# Altium PCB PD.PcbDoc
Units mil, origin at the board's own origin, x right, y up, seen from the top; angles counter-clockwise.
Board outline 1400 x 1470 mil, 2 copper layers (Top Layer, Bottom Layer); 38 components, 14 nets, 97 pads, 72 vias.
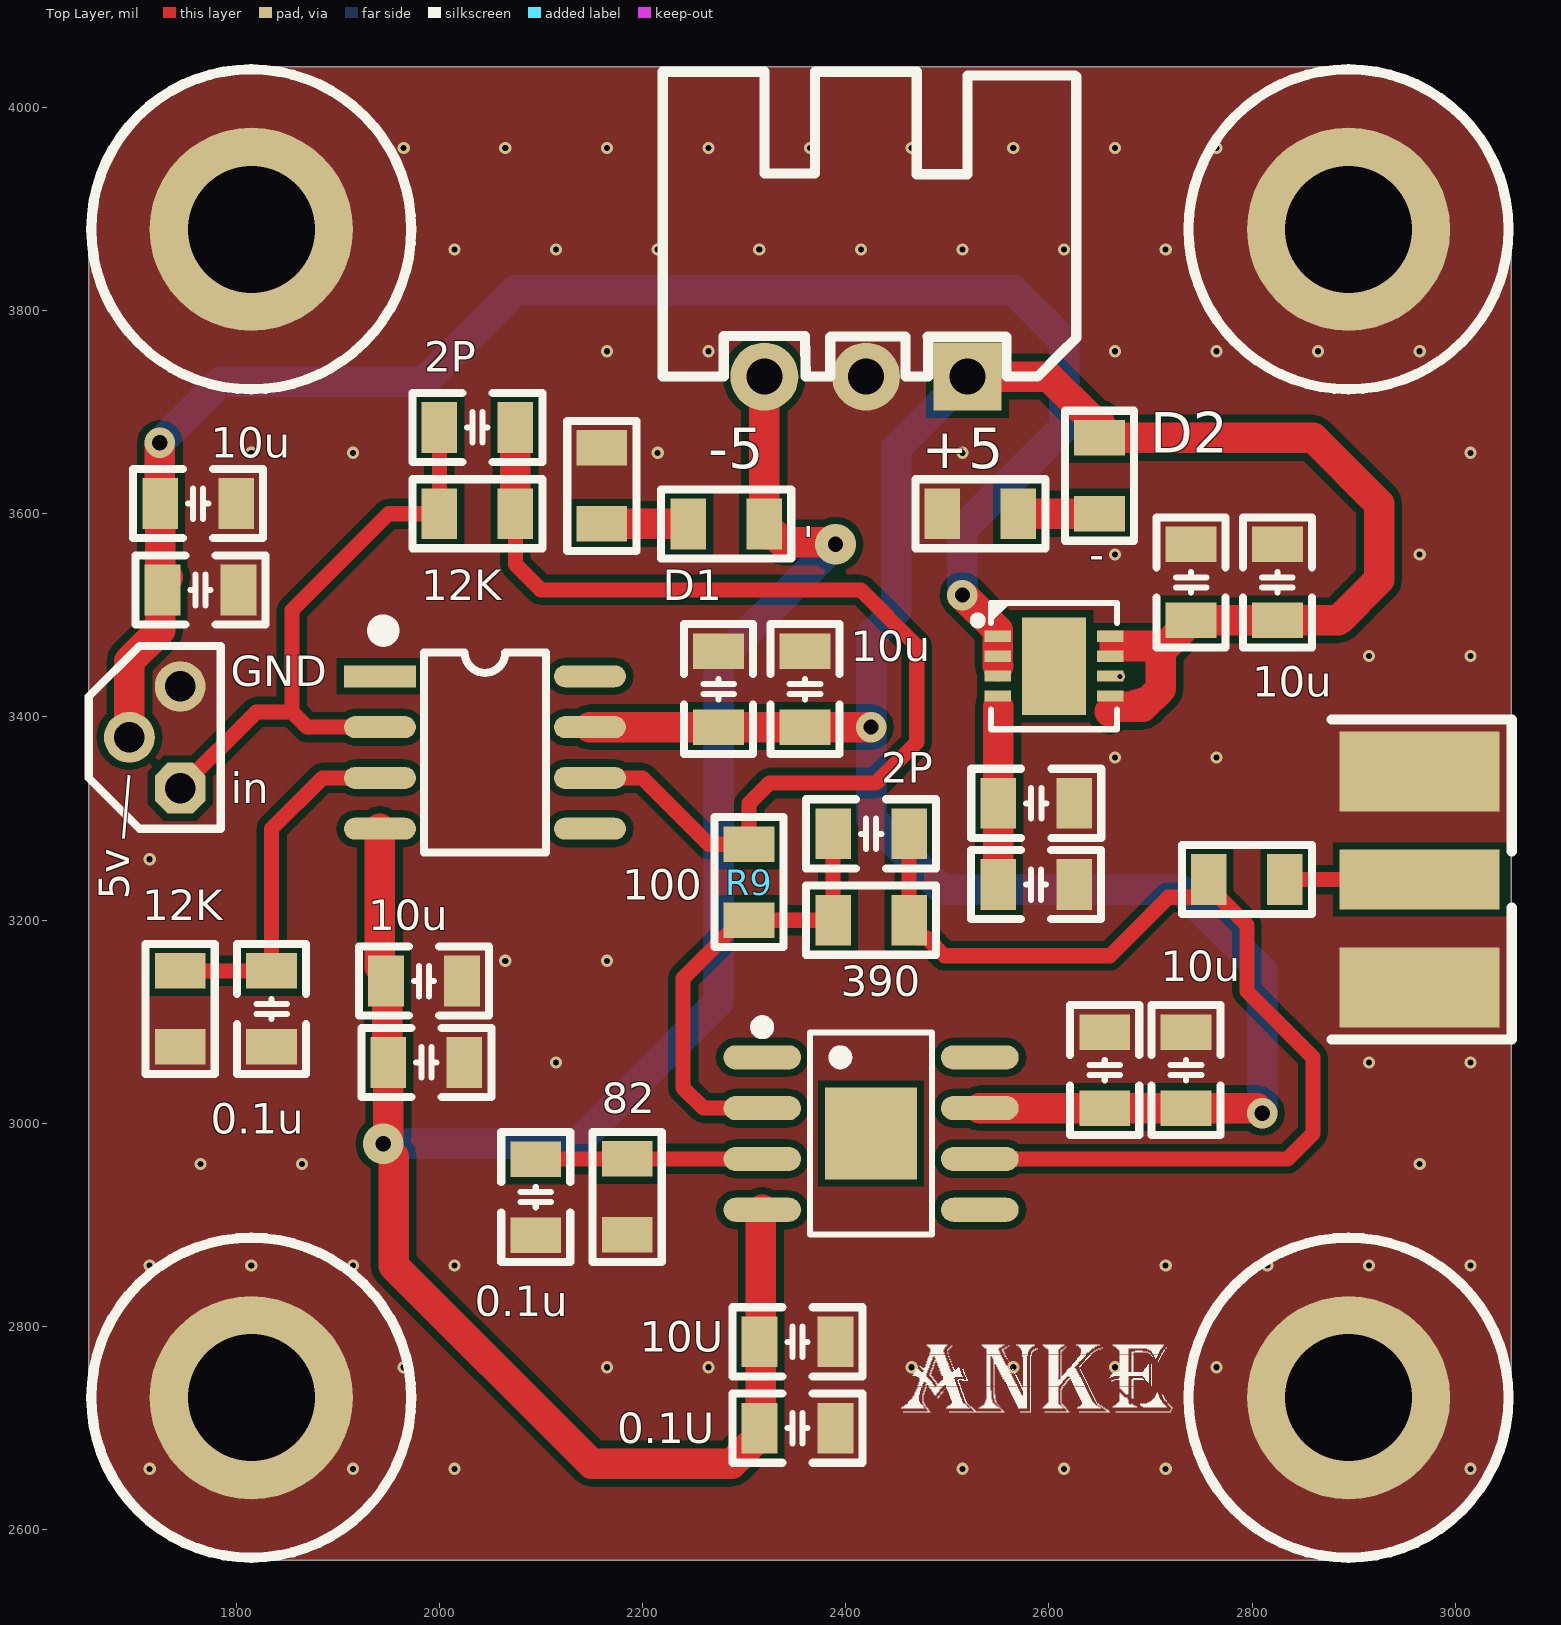
[diagram p0: Top Layer view]
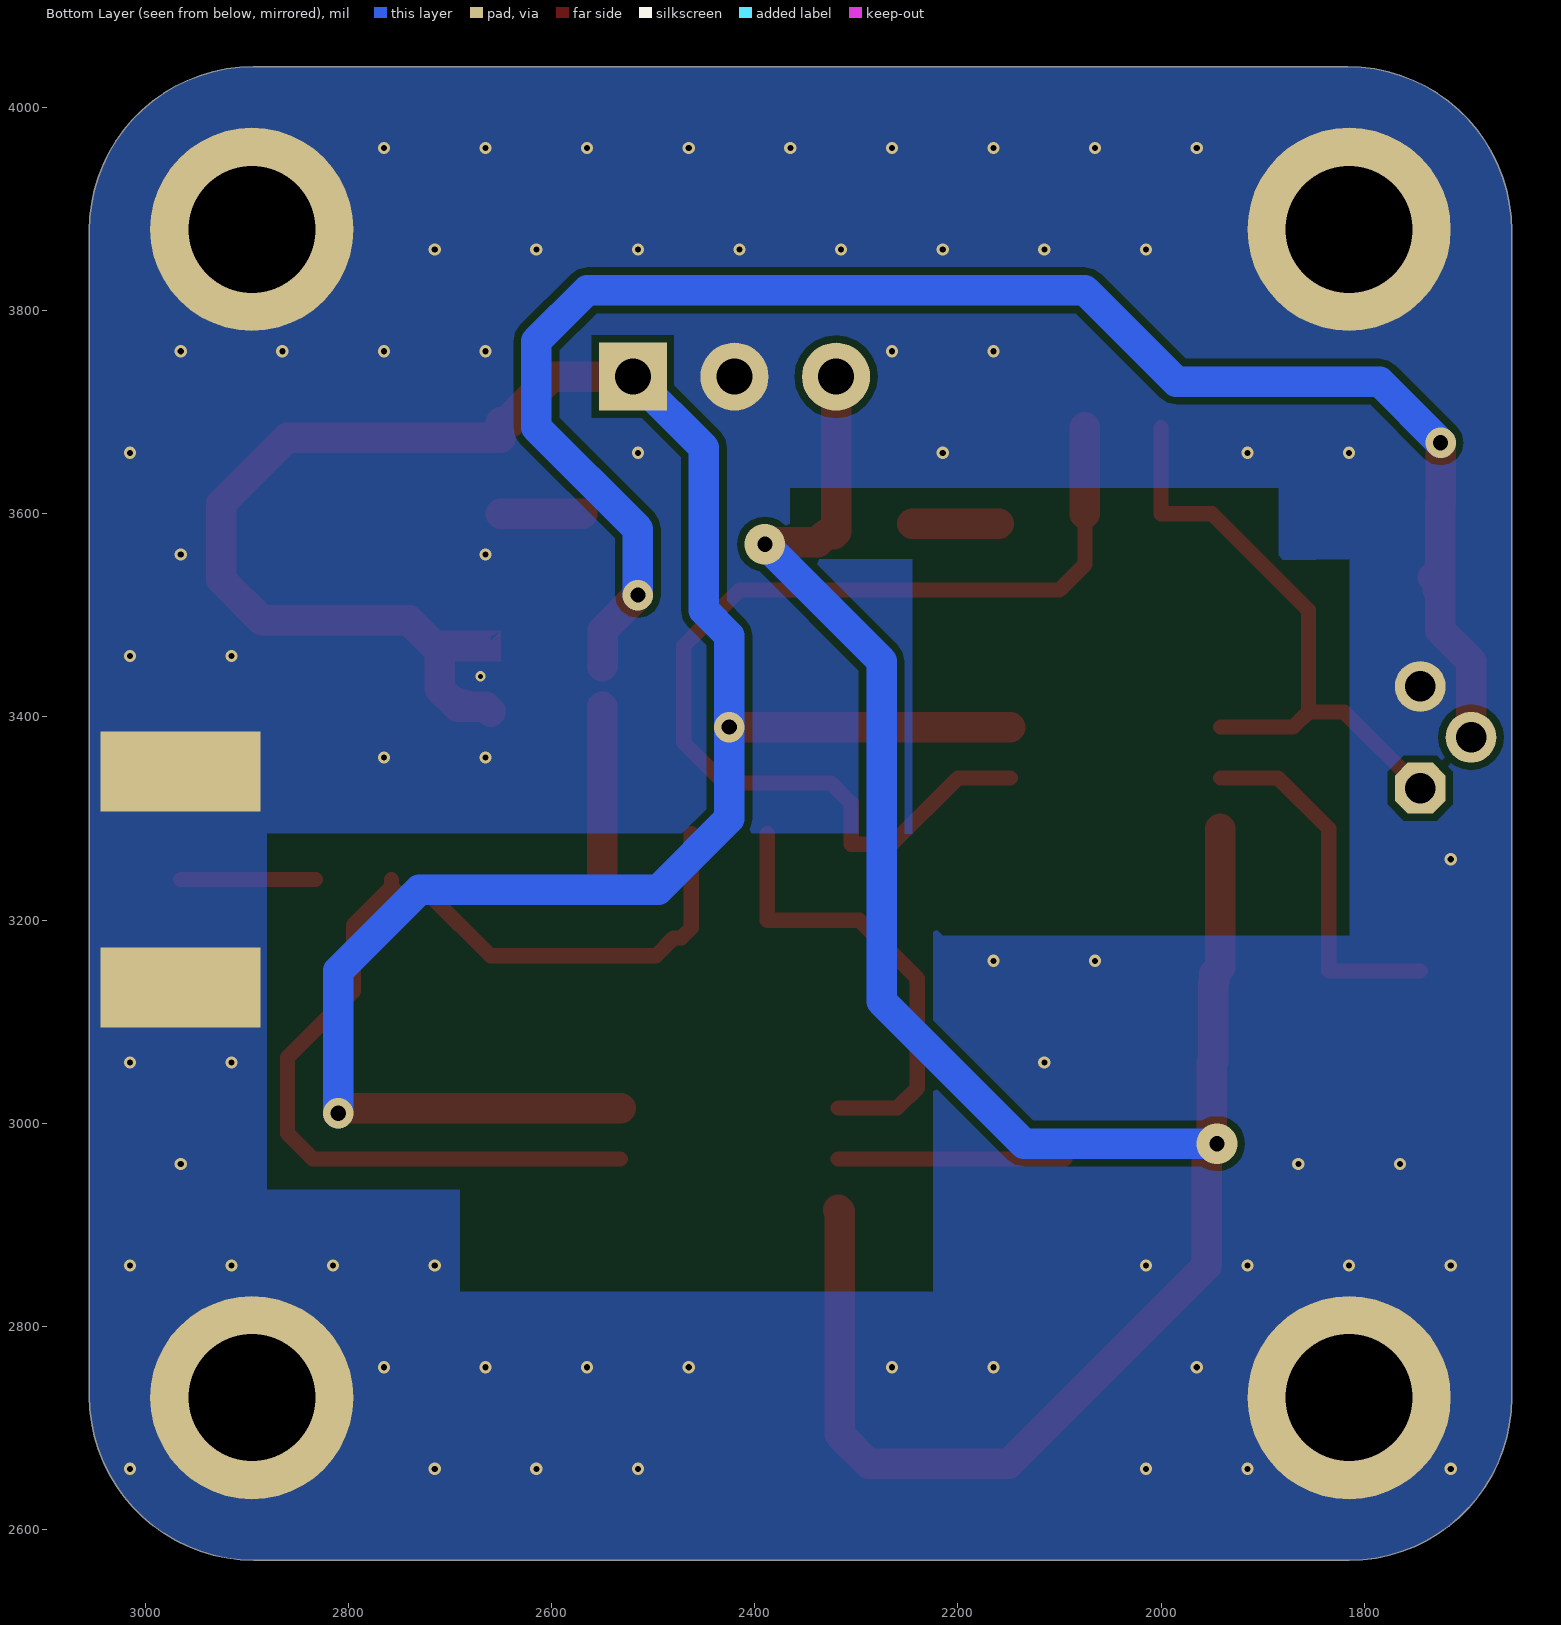
[diagram p1: Bottom Layer view, seen from below]
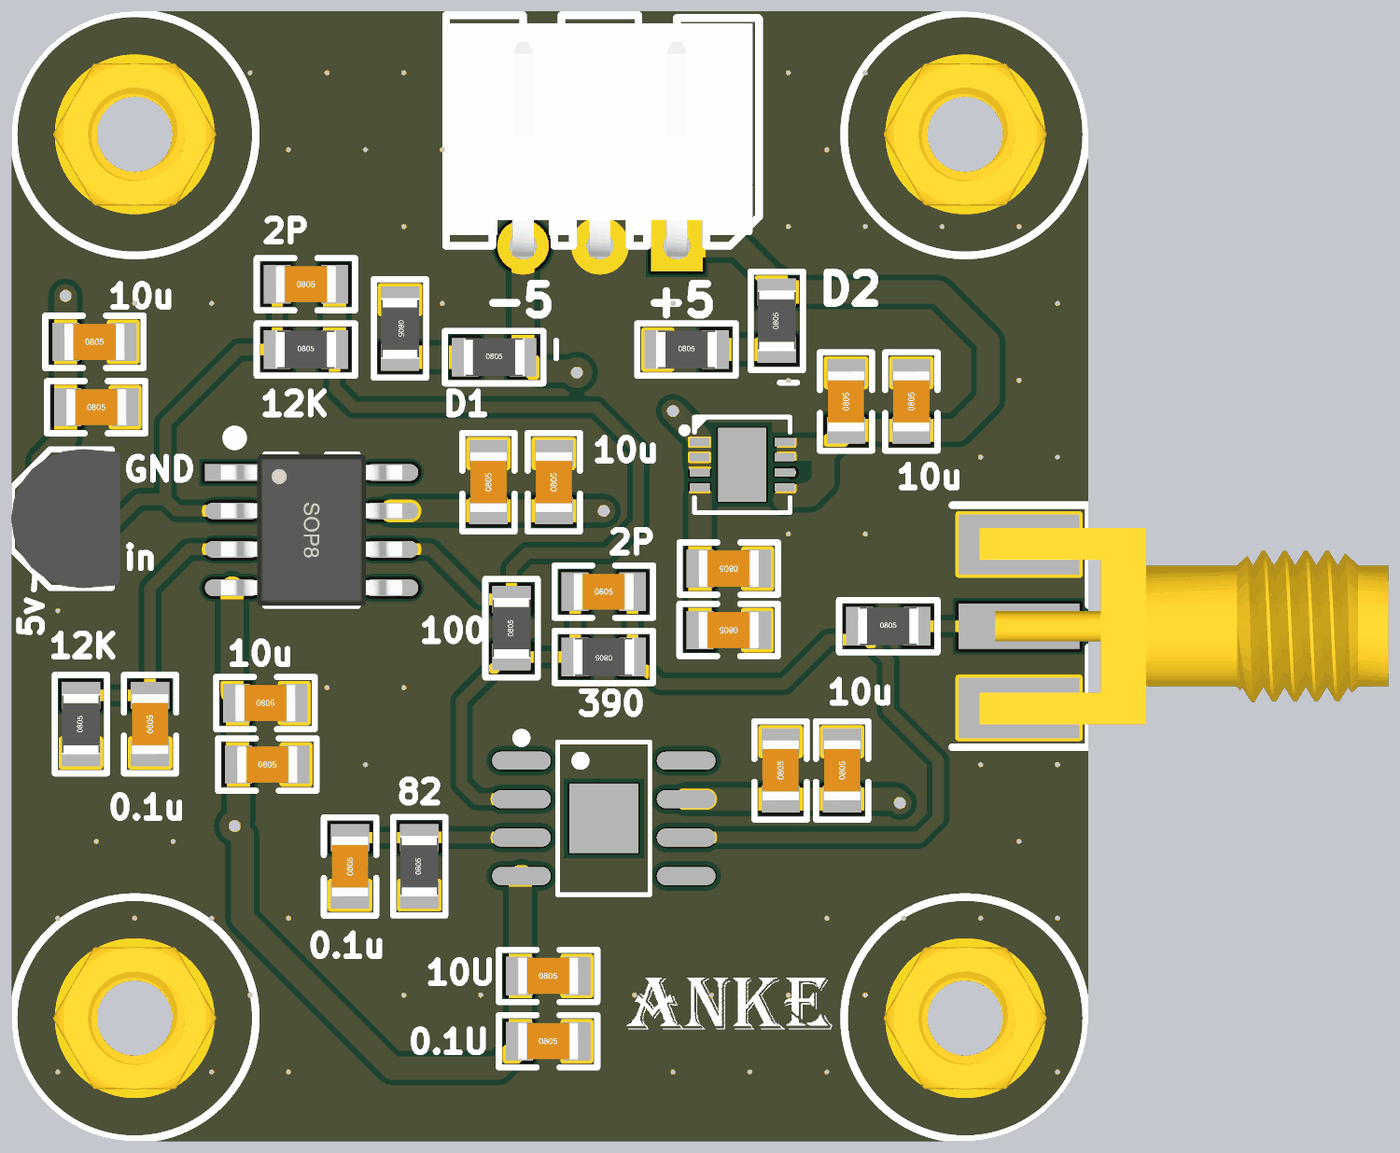
[diagram p2: 3D render of the assembled board from above, using the file's embedded part models]

## Layer stack, top to bottom
Top Solder: solder mask 0.4, Solder Resist, Dk 3.5
Top Layer: signal copper 1.4
Dielectric 1: dielectric 12.6, FR-4, Dk 4.8
Bottom Layer: signal copper 1.4
Bottom Solder: solder mask 0.4, Solder Resist, Dk 3.5

## Board outline
1814.81,2570 cw(c1814.81,2729.81) 1655,2729.81 1655,3878.67 cw(c1816.33,3878.67) 1816.33,4040 2893.67,4040 cw(c2893.67,3878.67) 3055,3878.67 3055,2732.08 cw(c2892.92,2732.08) 2892.92,2570

## Design rules (kind name [scope] priority, off if disabled: settings)
Clearance [All] p1: gap=7 ignorepadtopadclearanceinfootprint=FALSE
PolygonConnect [All] p1: connectstyle=Direct reliefconductorwidth=10 reliefentries=4 polygonreliefangle="90 Angle" airgapwidth=10
RoutingVias [All] p1: holewidth=28 width=50 viastyle="Through Hole" minholewidth=28 minwidth=50 maxholewidth=28 maxwidth=50
SolderMaskExpansion [All] p1: expansion=4 istentingtop=FALSE
Width [All] p1: maxlimit=35 minlimit=10 preferedwidth=15 minimp=50.000000 maximp=50.000000 favimp=50.000000
30 further rules are at their usual default settings.

## Classes and differential pairs
component class PD: R9

## Components (designator, comment, footprint, x,y, rotation, side; value= is the part's Value field where it differs from the comment)
0.1U "104" "C 0805_L" 2352.6,2700 r0 top (schematic designator C16)
2P "104" "C 0805_L" 2425,3285 r0 top (schematic designator C9)
2P "104" "C 0805_L" 2037.6,3685 r0 top (schematic designator C5)
10U "104" "C 0805_L" 2352.6,2785 r0 top (schematic designator C17)
12K "1K" "R 0805_L" 1745,3112.6 r90 top (schematic designator R4)
12K "1K" "R 0805_L" 2037.6,3600 r0 top (schematic designator R1)
82 "1K" "R 0805_L" 2185,2927.6 r90 top (schematic designator R6)
390 "1K" "R 0805_L" 2425,3200 r180 top (schematic designator R5)
* "1ADA4817" SOP8_N 2045,3365 r0 top
C1 "104" "C 0805_L" 2740,3532.41 r90 top
C2 "104" "C 0805_L" 2825,3532.41 r90 top
C3 "104" "C 0805_L" 1765,3525 r0 top
C4 "104" "C 0805_L" 1762.6,3610 r0 top
C6 "104" "C 0805_L" 2587.4,3235 r180 top
C7 "104" "C 0805_L" 2587.59,3315 r180 top
C8 "104" "C 0805_L" 1835,3112.6 r90 top
C10 "104" "C 0805_L" 2360,3427.41 r90 top
C11 "104" "C 0805_L" 2735,3052.41 r90 top
C12 "104" "C 0805_L" 2275,3427.41 r90 top
C13 "104" "C 0805_L" 2655,3052.41 r90 top
C14 "104" "C 0805_L" 1985,3140 r0 top
C15 "104" "C 0805_L" 1987.4,3060 r0 top
C18 "104" "C 0805_L" 2095,2927.4 r90 top
D1 "1K" "R 0805_L" 2282.4,3590 r0 top (schematic designator R8)
JP1 "HDR-1X3" XH2.54-WI-3P 2420,3735 r180 top
JP2 "SMA" SMA-KE 2965,3240 r270 top
Q1 "D882-DIP" TO92B 1695,3380 r90 top
R2 "1K" "R 0805_L" 2532.6,3600 r0 top
R3 "1K" "R 0805_L" 2160,3627.4 r270 top
R7 "1K" "R 0805_L" 2650,3637.41 r90 top
R9 "1K" "R 0805_L" 2305,3237.41 r90 top
R10 "1K" "R 0805_L" 2795,3240 r0 top
SP1 "M3铜柱" M3x4_L 1815,3880 r0 top
SP2 "M3铜柱" M3x4_L 2895,3880 r0 top
SP3 "M3铜柱" M3x4_L 1815,2730 r0 top
SP4 "M3铜柱" M3x4_L 2895,2730 r0 top
U1 "ADM7170ACPZ-R7" LFCSP-8_L3.0-W3.0-P0.50-BL-EP 2605,3450 r270 top
U2 "ADA4817-1ARDZ" SOIC-8_L4.9-W3.9-P1.27-LS6.0-BL-EP2.3 2425,2990 r270 top

## Footprints (in the part's own frame and the unit in brackets; to place one, negate y for a bottom-side part, rotate by r counter-clockwise, add the part's x,y. Pads: shape width x height; smd on the part's side, far side on the other; paste and mask are expansions set on the pad)
"C 0805_L" [mil] "无极性贴片电容"
  rect 35x50 smd: 1(-37.4,0) 2(37.4,0)
  silkscreen extent -64,-34 64,34, body extent -39,-24 39,24, height 20
LFCSP-8_L3.0-W3.0-P0.50-BL-EP [mil]
  rect 96.1x63 smd mask+2: 0(0,0)
  rect 11x26.2 smd mask+2: 1(-29.5,-55.4) 2(-9.8,-55.4) 3(9.8,-55.4) 4(29.5,-55.4) 5(29.5,55.4) 6(9.8,55.4) 7(-9.8,55.4) 8(-29.5,55.4)
  silkscreen extent -62,-79 62,62
M3x4_L [mil] "M3铜柱，长：4mm"
  round 200 hole 125: 1(0,0)
  silkscreen extent -157,-157 157,157, body extent -106,-93 106,93, height 159
"R 0805_L" [mil] "1/8W贴片电阻"
  rect 35x50 smd: 1(-37.41,0) 2(37.4,0)
  silkscreen extent -64,-34 64,34, body extent -39,-25 39,25, height 20
SMA-KE [mm] "SMA 偏脚射频天线座     淘宝ID:黄晶宝石"
  rect 1.5x4 smd: 1(0,0)
  rect 2x4 smd: 2(-2.7,0) 2(2.7,0)
  rect 2x4 smd far side: 3(-2.7,0) 3(2.7,0)
  silkscreen extent -4,-2.2 4,2.3, body extent -3.25,-1.3 3.25,12.2, height 3.75
SOIC-8_L4.9-W3.9-P1.27-LS6.0-BL-EP2.3 [mm]
  oval 0.602x1.941 smd mask+0.05: 1(-1.905,-2.721) 2(-0.635,-2.721) 3(0.635,-2.721) 4(1.905,-2.721) 5(1.905,2.721) 6(0.635,2.721) 7(-0.635,2.721) 8(-1.905,2.721)
  rect 2.29x2.29 smd mask+0.05: 9(0,0)
  silkscreen extent -2.81,-2.87 2.53,1.52
SOP8_N [mm] "5*6*1.8mm（长宽高）"
  rect 1.8x0.55 smd: 1(-2.625,1.905)
  oval 1.8x0.55 smd: 2(-2.625,0.635) 3(-2.625,-0.635) 4(-2.625,-1.905) 5(2.625,-1.905) 6(2.625,-0.635) 7(2.625,0.635) 8(2.625,1.905)
  silkscreen extent -2.69,-2.5 1.52,3.2, body extent -3,-2.5 3,2.5, height 1.9
TO92B [mil] "92晶体管"
  oct 50x50 hole 30: 1(-50,-50)
  round 50 hole 30: 2(0,0) 3(50,-50)
  silkscreen extent -90,-90 90,40, body extent -91,-101 91,41, height 118
XH2.54-WI-3P [mm] "接插件，3P"
  rect 1.7x1.7 hole 0.9: 1(-2.54,0)
  round 1.7 hole 0.9: 2(0,0) 3(2.54,0)
  silkscreen extent -5.26,-7.62 5.08,0, body extent -5.04,-7.35 5.04,0.35, height 5.73

## Part data
0.1U 2P 2P 10U C1 C2 C3 C4 C6 C7 C8 C10 C11 C12 C13 C14 C15 C18: library part C, "无极性贴片电容", BOM名称=无极性贴片电容, 材质=X7R
12K 12K 82 390 D1 R2 R3 R7 R9 R10: library part R, "贴片电阻", BOM名称=贴片电阻
*: library part Component_1
JP1: library part "Header 3", "3P接插件", BOM名称=3P接插件
JP2: "SMA-2.4G射频天线接口", BOM名称=SMA-2.4G射频天线接口
Q1: "音频功放-NPN型", BOM名称=音频功放-NPN型, 属性="40V 3A 30W"
SP1 SP2 SP3 SP4: library part 铜柱小焊盘, "铜柱", BOM名称=铜柱
U1: JLCPCB Part Class="Extended Part", Manufacturer=ADI(亚德诺)/LINEAR(凌特), Add into BOM=yes, Convert to PCB=yes, Datasheet=https://atta.szlcsc.comnull, Device=ADM7170ACPZ-R7, LCSC Part Name=ADM7170ACPZ-R7, Manufacturer Part=ADM7170ACPZ-R7, Name=ADM7170ACPZ-R7, Supplier=LCSC, Supplier Footprint=LFCSP-8, Supplier Part=C658475, Symbol=ADM7170ACPZ-R7
U2: "运放类型:Voltage Feedback;放大器组数:1;增益带宽积（GBP）:410MHz;压摆率（SR）:870 V/us;电源电压:5V ~ 10V, ±2.5V ~ 5V;各通道供电电流:-;", JLCPCB Part Class="Extended Part", Manufacturer=ADI(亚德诺)/LINEAR, Operating Temperature="-40°C ~ 105°C", Supply Voltage（Single）="5V ~ 10V, ±2.5V ~ 5V", Add into BOM=yes, Amplifier Type="Voltage Feedback", Convert to PCB=yes, Datasheet=https://atta.szlcsc.com/upload/public/pdf/source/20180424/C208248_B6C816B2B54D5C6B6DFEDEB97F35E3C5.pdf, Device=ADA4817-1ARDZ, Gain Bandwidth Product（GBP）=410MHz, Iq per channel (Typ)=-, LCSC Part Name=ADA4817-1ARDZ, Manufacturer Part=ADA4817-1ARDZ, Name=ADA4817-1ARDZ, Number of Circuits=1, Output Type=-, Slew Rate（SR）="870 V/us", Supplier=LCSC, Supplier Footprint=SOIC-8_EP_150mil, Supplier Part=C208248, Symbol=ADA4817-1ARDZ

## Via types
v1: diameter 12, hole 6, Top Layer to Bottom Layer, tented both sides, 65 vias
v2: diameter 30, hole 15, Top Layer to Bottom Layer, tented both sides, 4 vias
v3: diameter 40, hole 15, Top Layer to Bottom Layer, tented both sides, 2 vias
v4: diameter 10, hole 5, Top Layer to Bottom Layer, 1 vias

## Nets (pads, with @x,y where several pads share a name; then routed paths per layer and width w, separated by ;. In a path a pad name is that pad's centre, name@x,y a point inside that pad or via, vN(x,y) a via of type N, cw(c..) or ccw(c..) an arc to the next point about the centre after c; other vN are vias at no path point)
+5V: *.7 C1.1 C2.1 C10.1 C11.1 C12.1 C13.1 JP1.1 R7.2 U1.5 U1.7 U1.8 U2.7 | length 2492.5
  Top Layer w30: *.7 C12.1 C10.1 v2(2425,3390) ; JP1.1 2600,3735 2640,3695 R7.2@2640,3690 ; U2.7 C13.1 C11.1 2805,3015 v2(2810,3010) ; R7.2@2650,3690 R7.2 2860.2,3674.8 2925,3610 2925,3535 2885,3495 C2.1 C1.1 2710,3465 2710,3427.57 2692.43,3410 2665,3410 2660,3405
  Bottom Layer w30: JP1.1 2450,3665 2450,3505 2425,3480 v2(2425,3390) 2425,3300 2495,3230 2730,3230 2810,3150 v2(2810,3010)
-5V: 0.1U.1 10U.1 *.4 C14.1 C15.1 D1.2 JP1.3 U2.4 | length 2229.2
  Top Layer w30: *.4 1941.65,3153.44 1947.6,3147.5 C14.1 1948.8,3138.79 1948.8,3061.2 C15.1 1950,2987.71 1945,2982.71 1945,2977.29 1955,2967.29 1955,2860 2150,2665 2287.7,2665 2316.54,2693.85 2316.54,2785 2316.54,2913.65 U2.4 ; JP1.3 2319.9,3734.9 2319.9,3590.1 D1.2 2319.8,3582.5 2322.3,3580 2329.8,3580 2337.89,3571.91 2388.09,3571.91 v3(2390,3570)
  Bottom Layer w30: v3(1945,2980) 2135,2980 2275,3120 2275,3455 v3(2390,3570)
GND: 0.1U.2 10U.2 12K.1@1745,3075.2 82.1 C1.2 C2.2 C3.2 C4.2 C6.1 C7.1 C8.1 C10.2 C11.2 C12.2 C13.2 C14.2 C15.2 C18.1 JP1.2 JP2.2 JP2.3 Q1.3 R2.1 R3.1 SP1.1 SP2.1 SP3.1 SP4.1 U1.6
  other v1: 1715,2660 1915,2660 2015,2660 2515,2660 2615,2660 2715,2660 3015,2660 1965,2760 2165,2760 2265,2760 2465,2760 2565,2760 2665,2760 2765,2760 1715,2860 1815,2860 1915,2860 2015,2860 2715,2860 2815,2860 2915,2860 3015,2860 1765,2960 1865,2960 2965,2960 2115,3060 2915,3060 3015,3060 2065,3160 2165,3160 1715,3260 2665,3360 2765,3360 2915,3460 3015,3460 2665,3560 2965,3560 1815,3660 1915,3660 2215,3660 2515,3660 3015,3660 2165,3760 2265,3760 2665,3760 2765,3760 2865,3760 2965,3760 2015,3860 2115,3860 2215,3860 2315,3860 2415,3860 2515,3860 2615,3860 2715,3860 1965,3960 2065,3960 2165,3960 2265,3960 2365,3960 2465,3960 2565,3960 2665,3960 2765,3960
  other v4: 2670,3440
Net*_2: 2P.1@2000.2,3685 12K.1@2000.2,3600 *.2 Q1.1 | length 603.5
  Top Layer w15: Q1.1 1820,3405 1855,3405 ; *.2 1870,3390 1855,3405 ; 2P.1@2000.2,3685 2000.2,3600 1950,3600 1855,3505 1855,3405
Net*_3: 12K.2@1745,3150 *.3 C8.2 | length 357.4
  Top Layer w15: 12K.2@1745,3150 C8.2 1835,3290 1885,3340 *.3
NetC6_2: C6.2 C7.2 U1.4 | length 175.2
  Top Layer w30: C6.2 2550.1,3235.1 2550.1,3314.9 C7.2 2550.2,3409.8 2550,3410
NetC9_1: 2P.1@2387.59,3285 390.2 R9.1 U2.2 | length 450.1
  Top Layer w15: U2.2 2260,3015 2240,3035 2240,3142.5 2297.5,3200 R9.1 390.2 2P.1@2387.6,3284.99
NetC9_2: 2P.2@2462.4,3285 390.1 R10.1 U2.6 | length 1057.7
  Top Layer w15: 2P.2@2462.4,3284.99 390.1 2462.41,3192.5 2472.41,3182.5 2479.91,3182.5 2497.41,3165 2660,3165 2717.5,3222.5 2747.59,3222.5 R10.1@2757.59,3232.5 ; U2.6 2835,2965 2860,2990 2860,3065 2795,3130 2795,3195.09 R10.1@2757.59,3232.5 ; R10.1 R10.1@2757.59,3232.5
NetC18_2: 82.2 C18.2 U2.3 | length 223
  Top Layer w15: C18.2 2095.1,2964.9 2184.9,2964.9 82.2 U2.3
NetR2_2: R2.2 R7.1 | length 80
  Top Layer w30: R2.2 R7.1
NetR3_2: D1.1 R3.2 | length 85
  Top Layer w30: R3.2 D1.1
o1: 2P.2@2075,3685 12K.2@2075,3600 *.6 R9.2 | length 1071.8
  Top Layer w15: 12K.2@2075,3600 2075,3550 2100,3525 2415,3525 2470,3470 2470,3375 2430,3335 2325,3335 2305,3315 R9.2 2265.2,3274.8 2200,3340 *.6
  Top Layer w30: 12K.2@2075,3600 2P.2@2075,3685
o2: JP2.1 R10.2 | length 132.6
  Top Layer w15: R10.2 JP2.1
Vo: C3.1 C4.1 Q1.2 U1.1 U1.2 U1.3 | length 1665.9
  Top Layer w30: Q1.2 1695,3455 1725.2,3485.2 C4.1 1725,3610.2 v2(1725,3670) ; C3.1 1727.6,3532.5 C3.1@1732.6,3537.5 ; v2(2515,3520) 2549.6,3485.4 U1.2 2549.6,3450.4 2550,3450
  Bottom Layer w30: v2(1725,3670) 1785,3730 1985,3730 2075,3820 2565,3820 2615,3770 2615,3685 2515,3585 v2(2515,3520)
pads on no net: *.1 *.5 *.8 U1.0 U2.1 U2.5 U2.8 U2.9

## Polygon pours and split planes (outlines as drawn)
GND on Top Layer "GND_L01_P000" (solid, remove dead copper, pour order 0): 1814.81,2570 cw(c1814.81,2729.81) 1655,2729.81 1655,3878.67 cw(c1816.33,3878.67) 1816.33,4040 2893.67,4040 cw(c2893.67,3878.67) 3055,3878.67 3055,2732.08 cw(c2892.92,2732.08) 2892.92,2570
GND on Bottom Layer "GND_L02_P001" (solid, pour order 1): 1814.81,2570 cw(c1814.81,2729.81) 1655,2729.81 1655,3878.67 cw(c1816.33,3878.67) 1816.33,4040 2893.67,4040 cw(c2893.67,3878.67) 3055,3878.67 3055,2732.08 cw(c2892.92,2732.08) 2892.92,2570

## Other copper
Top Layer:
  region net +5V: 2660.4,3420.5 2660.4,3414.6 2680,3395 2695,3410 2695,3423.75
  region net +5V: 2660.9,3420 2692.5,3420 2695,3417.5 2695,3430
  region net +5V: 2685,3485 2665,3465 2665,3455 2697.5,3455
  region net +5V: 2660.4,3479.5 2660.4,3459.8 2699.8,3459.8 2705,3465
  region net +5V: 2680,3455 2715,3455 2695,3475
  region net +5V: 2650,3455 2680,3455 2650,3485
  region net +5V: 2650,3485 2720,3485 2720,3460 2710,3450
Bottom Layer:
  pour cut-out: 2690,3285 2880,3285 2880,2935 2690,2935
  pour cut-out: 1885,3625 1885,3555 2355,3555 2365,3565 2365,3625
  pour cut-out: 2225,2835 2690,2835 2690,3285 2225,3285
  pour cut-out: 1815,3555 1815,3185 2215,3185 2245,3215 2245,3550

## Silkscreen, mask and mechanical layers (free items; w line width, h text height)
Top Overlay:
  drawing of 1050 lines, arcs and shapes, not listed
  text "D2" at 2700,3660 h40
  text "10u" at 1775,3655 h30
  text "-5" at 2265,3645 h40
  text "+5" at 2475,3645 h40
  text "-" at 2375,3575 h30 r90
  text "-" at 2640,3545 h30
  text "10u" at 2405,3455 h30
  text "GND" at 1795,3430 h30
  text "10u" at 2800,3420 h30
  text "in" at 1795,3315 h30
  text "___" at 1680.93,3281.27 h30 r85
  text "5v" at 1695,3220 h30 r90
  text "100" at 2180,3220 h30
  text "10u" at 1930,3190 h30
  text "10u" at 2710,3140 h30
  text "0.1u" at 1775,2990 h30
  text "0.1u" at 2035,2810 h30
Mechanical 1:
  lines w10: 1655,2729.81 ccw(c1814.81,2729.81) 1814.81,2570 2892.92,2570 ccw(c2892.92,2732.08) 3055,2732.08 3055,3305 3055,3878.67 ccw(c2893.67,3878.67) 2893.67,4040 1816.33,4040 ccw(c1816.33,3878.67) 1655,3878.67 1655,2729.81